# Altium PCB servox15_layout_board.PcbDoc
Units mil, origin at the board's own origin, x right, y up, seen from the top; angles counter-clockwise.
Board outline 4000 x 2240 mil, 2 copper layers (Top Layer, Bottom Layer); 26 components, 77 nets, 163 pads, 0 vias.
Unrouted connection lines stored in the file: 42.
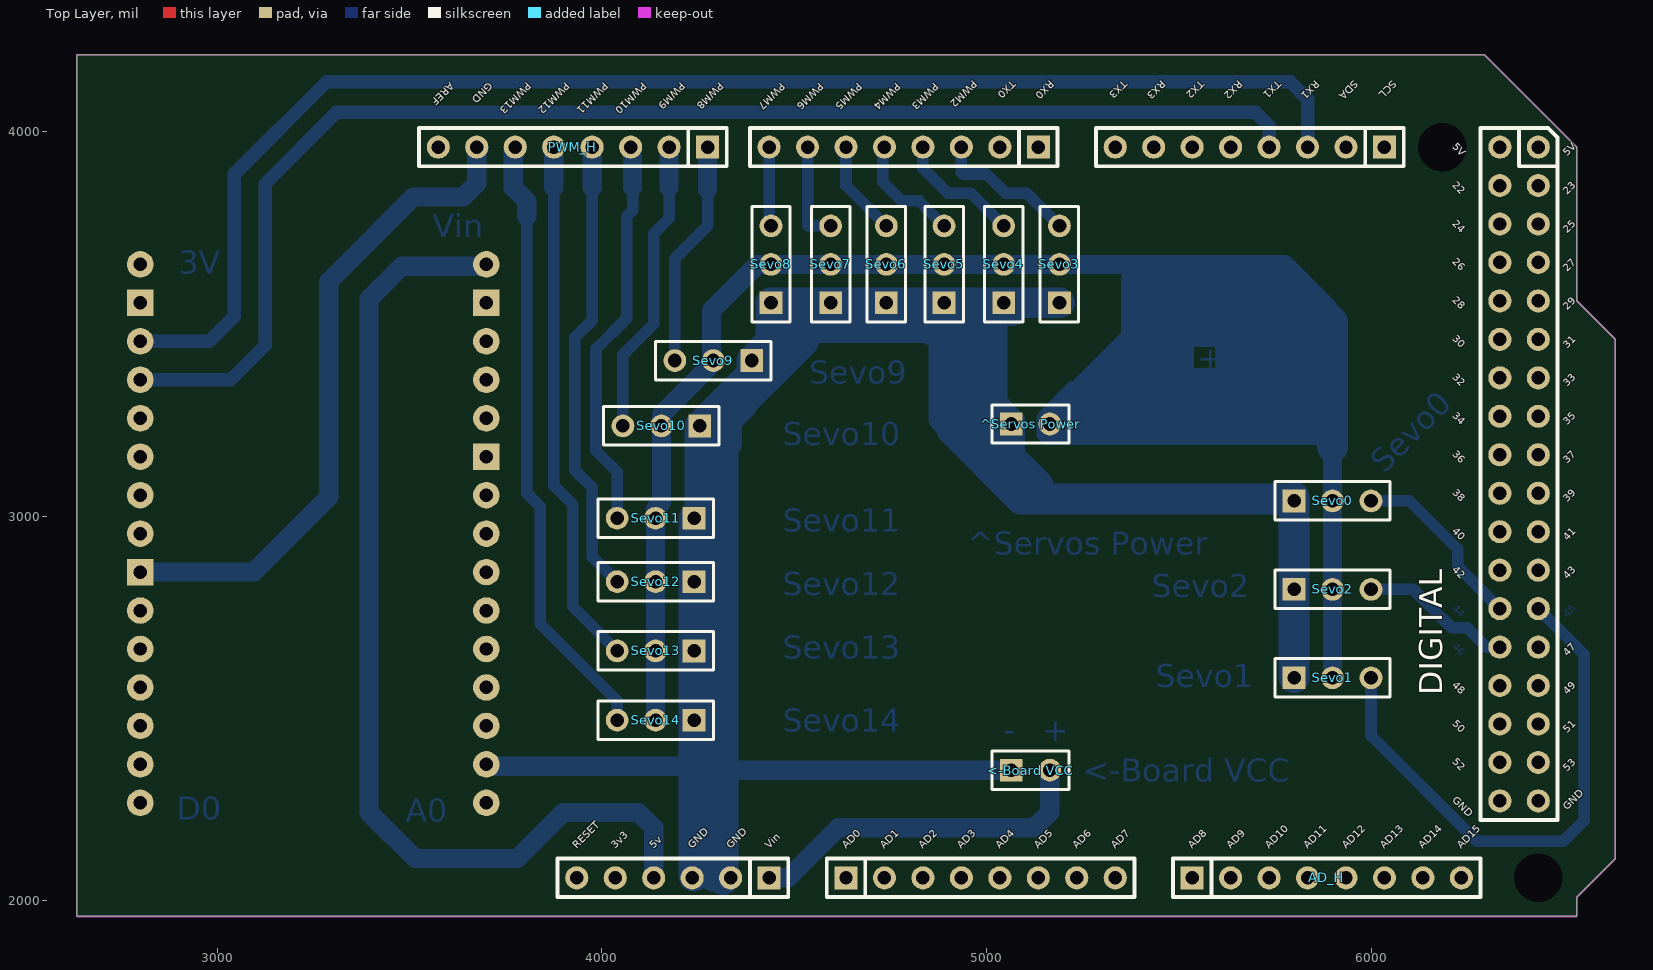
[diagram p0: Top Layer view]
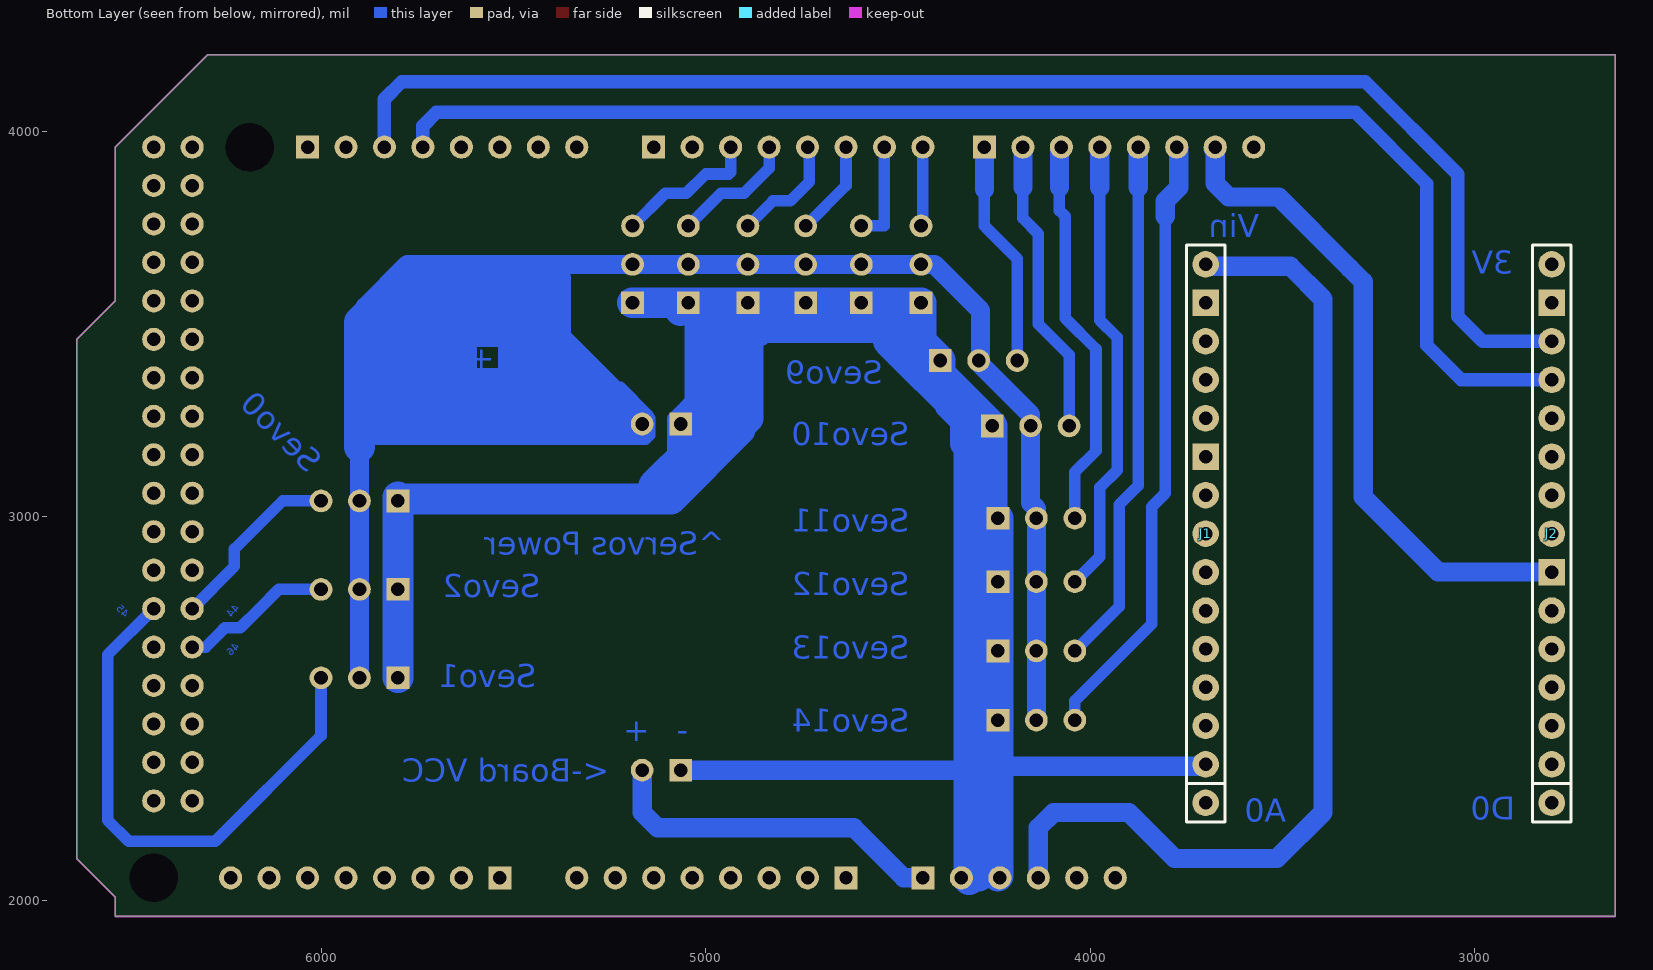
[diagram p1: Bottom Layer view, seen from below]

## Layer stack, top to bottom
Top Layer: signal copper 1.4
Dielectric: dielectric 12.6, FR-4, Dk 4.8
Bottom Layer: signal copper 1.4

## Board outline
2635,1960 2635,4200 6295,4200 6535,3960 6535,3560 6635,3460 6635,2110 6535,2010 6535,1960

## Design rules (kind name [scope] priority, off if disabled: settings)
Clearance [All] p1: gap=20
PolygonConnect [All] p1: connectstyle=Relief reliefconductorwidth=10 reliefentries=4 polygonreliefangle="90 Angle" airgapwidth=10
RoutingLayers [All] p1: top layer_v5=FALSE bottom layer_v5=TRUE
RoutingVias [All] p1: holewidth=28 width=50 viastyle="Through Hole" minholewidth=28 minwidth=50 maxholewidth=28 maxwidth=50
SolderMaskExpansion [All] p1: expansion=4
Width [All] p1: maxlimit=50 minlimit=25 preferedwidth=30
27 further rules are at their usual default settings.

## Classes and differential pairs
component class 05_IO_CONN: J1 J2
component class AdruinoMegaSheild: AD_H DIGITAL ICSP PWM_H
component class servox15_layout_board: "<-Board VCC" ^Servos AD_H DIGITAL PWM_H Sevo0 Sevo1 Sevo2 Sevo3 Sevo4 Sevo5 Sevo6 Sevo7 Sevo8 Sevo9 Sevo10 Sevo11 Sevo12 Sevo13 Sevo14

## Components (designator, comment, footprint, x,y, rotation, side; value= is the part's Value field where it differs from the comment)
"<-Board VCC" "Header 2" HDR1X2 5065,2340 r0 top (schematic designator "Board VCC")
"^Servos Power" "Header 2" HDR1X2 5065,3240 r0 top (schematic designator "Servos Power In(Vin)")
AD_H "AD_H" "Header 8x1 8.5mm" 5535,2060 r0 top locked
DIGITAL "IO_36" "HEADER 36X 8MM" 6435,3960 r270 top locked
J1 "THT_Male_P_1x15" THT_Male_P_1x15-2.54mm#1 3700,2255 r0 bottom locked
J2 "THT_Male_P_1x15" THT_Male_P_1x15-2.54mm#2 2800,2255 r0 bottom locked
PWM_H "PWM_H" "Header 8x1 8.5mm" 4275,3960 r180 top locked
Sevo0 "Pin44" HDR1X3 5800,3040 r0 top
Sevo1 "Pin45" HDR1X3 5800,2580 r0 top
Sevo2 "Pin46" HDR1X3 5800,2810 r0 top
Sevo3 "Pin2" HDR1X3 5190,3555 r90 top
Sevo4 "Pin3" HDR1X3 5045,3555 r90 top
Sevo5 "Pin4" HDR1X3 4890,3555 r90 top
Sevo6 "Pin5" HDR1X3 4740,3555 r90 top
Sevo7 "Pin6" HDR1X3 4595,3555 r90 top
Sevo8 "Pin7" HDR1X3 4440,3555 r90 top
Sevo9 "Pin8" HDR1X3 4390,3405 r180 top
Sevo10 "Pin9" HDR1X3 4255,3235 r180 top
Sevo11 "Pin10" HDR1X3 4240,2995 r180 top
Sevo12 "Pin11" HDR1X3 4240,2830 r180 top
Sevo13 "Pin12" HDR1X3 4240,2650 r180 top
Sevo14 "Pin13" HDR1X3 4240,2470 r180 top
? "Communication" "Header 8x1 8.5mm" 6035,3960 r180 top
? "AD_L" "Header 8x1 8.5mm" 4635,2060 r0 top locked
? "POWER" "Header 6x1 8.5mm" 4435,2060 r180 top locked
? "PWM_L" "Header 8x1 8.5mm" 5135,3960 r180 top locked

## Footprints (in the part's own frame and the unit in brackets; to place one, negate y for a bottom-side part, rotate by r counter-clockwise, add the part's x,y. Pads: shape width x height; smd on the part's side, far side on the other; paste and mask are expansions set on the pad)
HDR1X2 [mm] "Connector; Header; 2 Position"
  rect 1.5x1.5 hole 0.9: 1(0,0)
  round 1.5 hole 0.9: 2(2.54,0)
  silkscreen extent -1.27,-1.27 3.81,1.27
HDR1X3 [mm] "Connector; Header; 3 Position"
  rect 1.5x1.5 hole 0.9: 1(0,0)
  round 1.5 hole 0.9: 2(2.54,0) 3(5.08,0)
  silkscreen extent -1.27,-1.27 6.35,1.27
"Header 6x1 8.5mm" [mil] "Stackable 6 pin header"
  rect 60x60 hole 35: 1(0,0)
  round 60 hole 35: 2(100,0) 3(200,0) 4(300,0) 5(400,0) 6(500,0)
  silkscreen extent -50,-50 550,50, body extent -50,-50 550,50, height 335
"Header 8x1 8.5mm" [mil] "Stackable 8 pin header"
  rect 60x60 hole 35: 1(0,0)
  round 60 hole 35: 2(100,0) 3(200,0) 4(300,0) 5(400,0) 6(500,0) 7(600,0) 8(700,0)
  silkscreen extent -50,-50 750,50, body extent -50,-50 750,50, height 335
"HEADER 36X 8MM" [mil] "Stackable 10 pin header"
  round 60 hole 35: 1(0,0) 2(0,-100) 3(100,0) 4(100,-100) 5(200,0) 6(200,-100) 7(300,0) 8(300,-100) 9(400,0) 10(400,-100) 11(500,0) 12(500,-100) 13(600,0) 14(600,-100) 15(700,0) 16(700,-100) 17(800,0) 18(800,-100) 19(900,-100) 20(900,0) 21(1000,0) 22(1000,-100) 23(1100,0) 24(1100,-100) 25(1200,0) 26(1200,-100) 27(1300,0) 28(1300,-100) 29(1400,0) 30(1400,-100) 31(1500,0) 32(1500,-100) 33(1600,0) 34(1600,-100) 35(1700,0) 36(1700,-100)
  silkscreen extent -50,-150 1750,50, body extent -50,-150 1750,50, height 335
THT_Male_P_1x15-2.54mm#1 [mil] "THT Male pin header strip 1x15 2.54mm pitch"
  round 69 hole 35: 1(0,0) 2(0,-100) 3(0,-200) 4(0,-300) 5(0,-400) 6(0,-500) 7(0,-600) 8(0,-700) 9(0,-800) 11(0,-1000) 12(0,-1100) 13(0,-1200) 15(0,-1400)
  rect 69x69 hole 35: 10(0,-900) 14(0,-1300)
  silkscreen extent -50,-1450 50,50, body extent -57,-1450 57,50, height 335
THT_Male_P_1x15-2.54mm#2 [mil] "THT Male pin header strip 1x15 2.54mm pitch"
  round 69 hole 35: 1(0,0) 2(0,-100) 3(0,-200) 4(0,-300) 5(0,-400) 6(0,-500) 8(0,-700) 9(0,-800) 10(0,-900) 11(0,-1000) 12(0,-1100) 13(0,-1200) 15(0,-1400)
  rect 69x69 hole 35: 7(0,-600) 14(0,-1300)
  silkscreen extent -50,-1450 50,50, body extent -57,-1450 57,50, height 335

## Part data
"<-Board VCC" "^Servos Power": "Header, 2-Pin"
J1 J2: "THT Male pin header strip 1x15"
Sevo0 Sevo1 Sevo2 Sevo3 Sevo4 Sevo5 Sevo6 Sevo7 Sevo8 Sevo9 Sevo10 Sevo11 Sevo12 Sevo13 Sevo14: library part "Header 3", "Header, 3-Pin"

## Free pads (board coordinates)
  round 62.99 hole 125.98: 0(6185,3960) 0(6435,2060)

## Nets (pads, with @x,y where several pads share a name; then routed paths per layer and width w, separated by ;. In a path a pad name is that pad's centre, name@x,y a point inside that pad or via, vN(x,y) a via of type N, cw(c..) or ccw(c..) an arc to the next point about the centre after c; other vN are vias at no path point)
3V3: ?.5@4035,2060
5V: ?.4@4135,2060 DIGITAL.1 DIGITAL.2
AD0: ?.1@4635,2060
AD1: ?.2@4735,2060
AD2: ?.3@4835,2060
AD3: ?.4@4935,2060
AD4: ?.5@5035,2060
AD5: ?.6@5135,2060
AD6: ?.7@5235,2060
AD7: ?.8@5335,2060
AD8: AD_H.1
AD9: AD_H.2
AD10: AD_H.3
AD11: AD_H.4
AD12: AD_H.5
AD13: AD_H.6
AD14: AD_H.7
AD15: AD_H.8
AREF: PWM_H.8
GND: "<-Board VCC.1" "^Servos Power.1" ?.2@4335,2060 ?.3@4235,2060 DIGITAL.35 DIGITAL.36 PWM_H.7 Sevo0.1 Sevo1.1 Sevo2.1 Sevo3.1 Sevo4.1 Sevo5.1 Sevo6.1 Sevo7.1 Sevo8.1 Sevo9.1 Sevo10.1 Sevo11.1 Sevo12.1 Sevo13.1 Sevo14.1 | length 1.6
  Bottom Layer w50: PWM_H.7@3678.61,3954.14 PWM_H.7@3680,3955
IO22: DIGITAL.3
IO23: DIGITAL.4
IO24: DIGITAL.5
IO25: DIGITAL.6
IO26: DIGITAL.7
IO27: DIGITAL.8
IO28: DIGITAL.9
IO29: DIGITAL.10
IO30: DIGITAL.11
IO31: DIGITAL.12
IO32: DIGITAL.13
IO33: DIGITAL.14
IO34: DIGITAL.15
IO35: DIGITAL.16
IO36: DIGITAL.17
IO37: DIGITAL.18
IO38: DIGITAL.19
IO39: DIGITAL.20
IO40: DIGITAL.21
IO41: DIGITAL.22
IO42: DIGITAL.23
IO43: DIGITAL.24
IO47: DIGITAL.28
IO48: DIGITAL.29
IO49: DIGITAL.30
IO50: DIGITAL.31
IO51: DIGITAL.32
IO52: DIGITAL.33
IO53: DIGITAL.34
PWM2: ?.3@4935,3960
PWM3: ?.4@4835,3960
PWM4: ?.5@4735,3960
PWM5: ?.6@4635,3960
PWM6: ?.7@4535,3960
PWM7: ?.8@4435,3960
PWM8: PWM_H.1
PWM9: PWM_H.2
PWM10: PWM_H.3
PWM11: PWM_H.4
PWM12: PWM_H.5
PWM13: PWM_H.6
PWM44: DIGITAL.25 Sevo0.3
PWM45: DIGITAL.26 Sevo1.3
PWM46: DIGITAL.27 Sevo2.3
RESET: ?.6@3935,2060
RX0: ?.1@5135,3960
RX1: ?.3@5835,3960
RX2: ?.5@5635,3960
RX3: ?.7@5435,3960
RXD0: ?.4@5735,3960
SCL: ?.1@6035,3960
SDA: ?.2@5935,3960
TX0: ?.2@5035,3960
TX2: ?.6@5535,3960
TX3: ?.8@5335,3960
VCC: "<-Board VCC.2"
VIN: "^Servos Power.2" ?.1@4435,2060 Sevo0.2 Sevo1.2 Sevo2.2 Sevo3.2 Sevo4.2 Sevo5.2 Sevo6.2 Sevo7.2 Sevo8.2 Sevo9.2 Sevo10.2 Sevo11.2 Sevo12.2 Sevo13.2 Sevo14.2
pads on no net: J1.1 J1.2 J1.3 J1.4 J1.5 J1.6 J1.7 J1.8 J1.9 J1.10 J1.11 J1.12 J1.13 J1.14 J1.15 J2.1 J2.2 J2.3 J2.4 J2.5 J2.6 J2.7 J2.8 J2.9 J2.10 J2.11 J2.12 J2.13 J2.14 J2.15 Sevo3.3 Sevo4.3 Sevo5.3 Sevo6.3 Sevo7.3 Sevo8.3 Sevo9.3 Sevo10.3 Sevo11.3 Sevo12.3 Sevo13.3 Sevo14.3
copper on no net: | length 50187.7
  Bottom Layer w20: 5165,3275 5165,3255 5140,3230 5140,3215 5140,3210 5155,3195 5155,3200 5180,3225 5190,3225 5205,3240 5205,3230 5185,3210 5175,3200 5205,3200 5205,3250 5200,3255 5195,3255 5180,3270 5180,3295 5225,3340 5220,3340 5145,3265 5170,3265 5235,3330
  Bottom Layer w30: 3770,3955 3775,3960 ; 3805,3780 3805,3060 3840,3025 3840,2720 4040,2520 4040,2470 ; 3875,3855 3875,3780 3875,3585 3875,3080 3925,3030 3925,2765 4040,2650 ; 3975,3855 3975,3510 3930,3465 3930,3120 3975,3075 3975,2895 4040,2830 ; 4040,2995 4040,3115 3985,3170 3985,3435 4065,3515 4065,3780 4080,3795 4080,3855 ; 4055,3235 4055,3420 4135,3500 4135,3735 4175,3775 4175,3855 ; 4075,3960 4080,3955 ; 4190,3405 4190,3670 4270,3750 4275,3755 4275,3850 ; 4270,3955 4275,3960 ; 4435,3960 4435,3760 ccw(c4440,3760) 4440,3755 ; 4535,3960 4535,3755 4595,3755 ; 4635,3960 4635,3860 4740,3755 ; 4735,3960 4730,3955 4730,3870 4780,3820 4800,3820 4825,3820 4890,3755 ; 4835,3960 4835,3905 4900,3840 4960,3840 5045,3755 ; 4935,3960 4935,3895 4940,3890 5000,3890 5050,3840 5105,3840 5190,3755 ; 5045,3295 5055,3285 5070,3270 5085,3255 5085,3175 5080,3180 5080,3195 5065,3210 5065,3240 ; 5155,3205 5160,3200 5445,3200 ; 5165,3275 5165,3255 5145,3235 5145,3255 5155,3265 5155,3245 5150,3240 5150,3215 5155,3220 5175,3220 5165,3210 5185,3210 5195,3220 5200,3215 5200,3205 5205,3200 5205,3210 5215,3220 ; 5425,3205 5435,3215 5390,3215 5385,3220 5255,3220 5250,3215 5220,3215 5215,3220 ; 6000,2580 6000,2430 6275,2155 6500,2155 6555,2210 6555,2640 6435,2760 ; 6000,2810 6110,2810 6160,2760 6210,2710 6250,2710 6265,2695 6300,2660 6335,2660 ; 6000,3040 6100,3040 6225,2915 6225,2870 6335,2760 ; 5065,3240 5045,3220 5045,3210 5045,3280 5065,3260 5065,3240 ; 5215,3220 5215,3225 5215,3220
  Bottom Layer w35: 2800,3355 3035,3355 3125,3445 3125,3865 3310,4050 5700,4050 5735,4015 5735,3960 ; 2800,3455 2980,3455 3045,3520 3045,3890 3285,4130 5790,4130 5835,4085 5835,3960
  Bottom Layer w50: 2800,2855 3095,2855 3290,3050 3290,3610 3325,3645 3510,3830 3640,3830 3675,3865 3675,3960 ; 3700,2355 3705,2350 4230,2350 4245,2335 4245,2250 ; 3700,3655 3695,3650 3480,3650 3395,3565 3395,2230 3515,2110 3780,2110 3900,2230 4095,2230 4135,2190 4135,2060 ; 3775,3960 3770,3955 3770,3855 3805,3820 3805,3780 ; 3875,3855 3875,3960 ; 3975,3855 3975,3960 ; 4075,3960 4080,3955 4080,3855 ; 4140,2470 4140,2830 4140,3020 4155,3035 4155,3265 4285,3395 4285,3535 4405,3655 4440,3655 4595,3655 4890,3655 5190,3655 5505,3655 5480,3630 5480,3565 5460,3585 ; 4175,3855 4175,3960 ; 4230,2065 4230,2280 4235,2285 ; 4275,3850 4275,3960 ; 4295,2250 4320,2250 ; 4295,2345 4300,2340 5065,2340 ; 4435,2060 4485,2060 4615,2190 5125,2190 5165,2230 5165,2340 ; 5395,3640 5395,3575 5420,3600 5420,3540 5390,3570 5390,3635 5375,3620 5375,3435 5510,3570 5605,3570 5690,3655 5485,3655 5540,3600 5565,3600 5537.5,3627.5 5627.5,3627.5 5655,3655 5775,3655 5885,3545 5750,3545 5740,3555 5740,3570 5715,3595 5700,3595 5695,3600 5655,3600 5665,3590 5665,3575 5655,3585 5635,3605 5600,3605 5620,3625 5795,3625 5790,3620 5790,3595 5790,3585 5780,3595 5630,3595 5650,3575 5815,3575 5810,3570 5525,3570 5510,3585 ; 5405,3490 5405,3565 5460,3620 5460,3585 ; 5430,3635 5430,3630 5435,3625 5500,3625 5540,3585 5460,3585 ; 5510,3450 5510,3360 5515,3355 5515,3480 5525,3490 ; 5565,3530 5515,3530 5460,3585 ; 5620,3460 5620,3355 5630,3345 ; 5660,3455 5660,3365 5655,3360 5655,3375 5720,3440 ; 5765,3475 5885,3475 5885,3410 5900,3395 5900,3220 5890,3210 5425,3210 5410,3225 5560,3225 5790,3455 5840,3455 5860,3435 5810,3435 5765,3390 5765,3380 5620,3235 5850,3235 5850,3405 5860,3415 5845,3415 5830,3400 5830,3395 5795,3360 5795,3345 5780,3330 5770,3330 5700,3260 5795,3260 5840,3305 5840,3320 5815,3345 5810,3345 5765,3300 5770,3300 5775,3295 ; 5900,2580 5900,2810 5900,3050 5900,3180
  Bottom Layer w80: 4240,2065 4240,2470 4240,2650 4240,2830 4240,2995 4255,3010 4255,3235 4390,3370 4390,3405 4440,3455 4440,3555 ; 4280,2075 4280,2855 4265,2870 4265,3190 4365,3290 4365,3305 4500,3440 4500,3470 ; 4290,2065 4290,3155 4325,3190 4325,3255 4525,3455 4520,3455 4315,3250 4315,2055 ; 4440,3490 4855,3490 4865,3480 ; 4450,3555 4595,3555 4740,3555 4890,3555 ; 4905,3240 4890,3255 4890,3555 ; 4910,3240 4910,3225 5090,3045 5795,3045 ; 4965,3280 4965,3515 ; 4975,3225 4990,3225 5015,3200 5035,3200 5050,3185 ; 5015,3255 5015,3540 ; 5040,3175 5135,3080 5135,3055 ; 5065,3535 5045,3555 5190,3555 4890,3555 ; 5425,3240 5395,3270 5200,3270 5215,3285 ; 5425,3435 5315,3325 5325,3325 5345,3345 5610,3345 ; 5445,3445 5435,3435 5460,3435 ; 5450,3530 5730,3530 5740,3520 5740,3480 ; 5475,3225 5475,3255 ; 5515,3355 5430,3355 5400,3325 5400,3380 5445,3425 5445,3380 5400,3335 5315,3335 5325,3345 5425,3345 5480,3290 5480,3315 5485,3310 5485,3235 5590,3340 ; 5700,3480 5410,3480 5215,3285 ; 5720,3515 5735,3515 5750,3530 5875,3530 5900,3505 5900,3180 ; 5800,2580 5800,2810 5800,3040 5795,3045 ; 5800,3050 5795,3045 ; 5215,3285 5510,3285 5465,3240 5435,3240 5480,3285 5215,3285

## Keep-outs
Keep-Out Layer:
  the board outline again, w5

## Other copper
Bottom Layer:
  text "Vin" at 3560,3725 h60
  text "3V" at 2900,3631 h60
  text "+" at 5548,3383 h60
  text "44" at 6210,2760 h20 r315
  text "45" at 6510,2735 h20 r45
  text "46" at 6210,2660 h20 r315
  text "-" at 5045,2415 h60
  text "+" at 5145,2415 h60
  text "D0" at 2895,2211 h60
  text "A0" at 3490,2206 h60

## Silkscreen, mask and mechanical layers (free items; w line width, h text height)
Top Overlay:
  text "PWM2" at 4965,4135 h20 r225
  text "TX0" at 5065,4135 h20 r225
  text "RX0" at 5165,4135 h20 r225
  text "TX3" at 5355,4135 h20 r225
  text "RX3" at 5455,4135 h20 r225
  text "TX2" at 5555,4135 h20 r225
  text "RX2" at 5655,4135 h20 r225
  text "TX1" at 5755,4135 h20 r225
  text "RX1" at 5855,4135 h20 r225
  text "SDA" at 5955,4135 h20 r225
  text "SCL" at 6055,4135 h20 r225
  text "AREF" at 3605,4130 h20 r225
  text "GND" at 3705,4130 h20 r225
  text "PWM13" at 3805,4130 h20 r225
  text "PWM12" at 3905,4130 h20 r225
  text "PWM11" at 4005,4130 h20 r225
  text "PWM10" at 4105,4130 h20 r225
  text "PWM9" at 4205,4130 h20 r225
  text "PWM8" at 4305,4130 h20 r225
  text "PWM7" at 4465,4127.93 h20 r225
  text "PWM6" at 4565,4127.93 h20 r225
  text "PWM5" at 4665,4127.93 h20 r225
  text "PWM4" at 4765,4127.93 h20 r225
  text "PWM3" at 4865,4127.93 h20 r225
  text "5V" at 6210,3960 h20 r315
  text "5V" at 6510,3935 h20 r45
  text "22" at 6210,3860 h20 r315
  text "23" at 6510,3835 h20 r45
  text "24" at 6210,3760 h20 r315
  text "25" at 6510,3735 h20 r45
  text "26" at 6210,3660 h20 r315
  text "27" at 6510,3635 h20 r45
  text "28" at 6210,3560 h20 r315
  text "29" at 6510,3535 h20 r45
  text "30" at 6210,3460 h20 r315
  text "31" at 6510,3435 h20 r45
  text "32" at 6210,3360 h20 r315
  text "33" at 6510,3335 h20 r45
  text "34" at 6210,3260 h20 r315
  text "35" at 6510,3235 h20 r45
  text "36" at 6210,3160 h20 r315
  text "37" at 6510,3135 h20 r45
  text "38" at 6210,3060 h20 r315
  text "39" at 6510,3035 h20 r45
  text "40" at 6210,2960 h20 r315
  text "41" at 6510,2935 h20 r45
  text "42" at 6210,2860 h20 r315
  text "43" at 6510,2835 h20 r45
  text "47" at 6510,2635 h20 r45
  text "48" at 6210,2560 h20 r315
  text "49" at 6510,2535 h20 r45
  text "50" at 6210,2460 h20 r315
  text "51" at 6510,2435 h20 r45
  text "52" at 6210,2360 h20 r315
  text "53" at 6510,2335 h20 r45
  text "GND" at 6210,2260 h20 r315
  text "GND" at 6510,2235 h20 r45
  text "RESET" at 3935,2135 h20 r45
  text "3v3" at 4035,2135 h20 r45
  text "5v" at 4135,2135 h20 r45
  text "GND" at 4235,2135 h20 r45
  text "GND" at 4335,2135 h20 r45
  text "Vin" at 4435,2135 h20 r45
  text "AD0" at 4635,2135 h20 r45
  text "AD1" at 4735,2135 h20 r45
  text "AD2" at 4835,2135 h20 r45
  text "AD3" at 4935,2135 h20 r45
  text "AD4" at 5035,2135 h20 r45
  text "AD5" at 5135,2135 h20 r45
  text "AD6" at 5235,2135 h20 r45
  text "AD7" at 5335,2135 h20 r45
  text "AD8" at 5535,2135 h20 r45
  text "AD9" at 5635,2135 h20 r45
  text "AD10" at 5735,2135 h20 r45
  text "AD11" at 5835,2135 h20 r45
  text "AD12" at 5935,2135 h20 r45
  text "AD13" at 6035,2135 h20 r45
  text "AD14" at 6135,2135 h20 r45
  text "AD15" at 6235,2135 h20 r45
Mechanical 1:
  circle w5: c6435,2060 r62.99
  circle w5: c6185,3960 r62.99